# EAGLE board board (EAGLE 9.0.0)
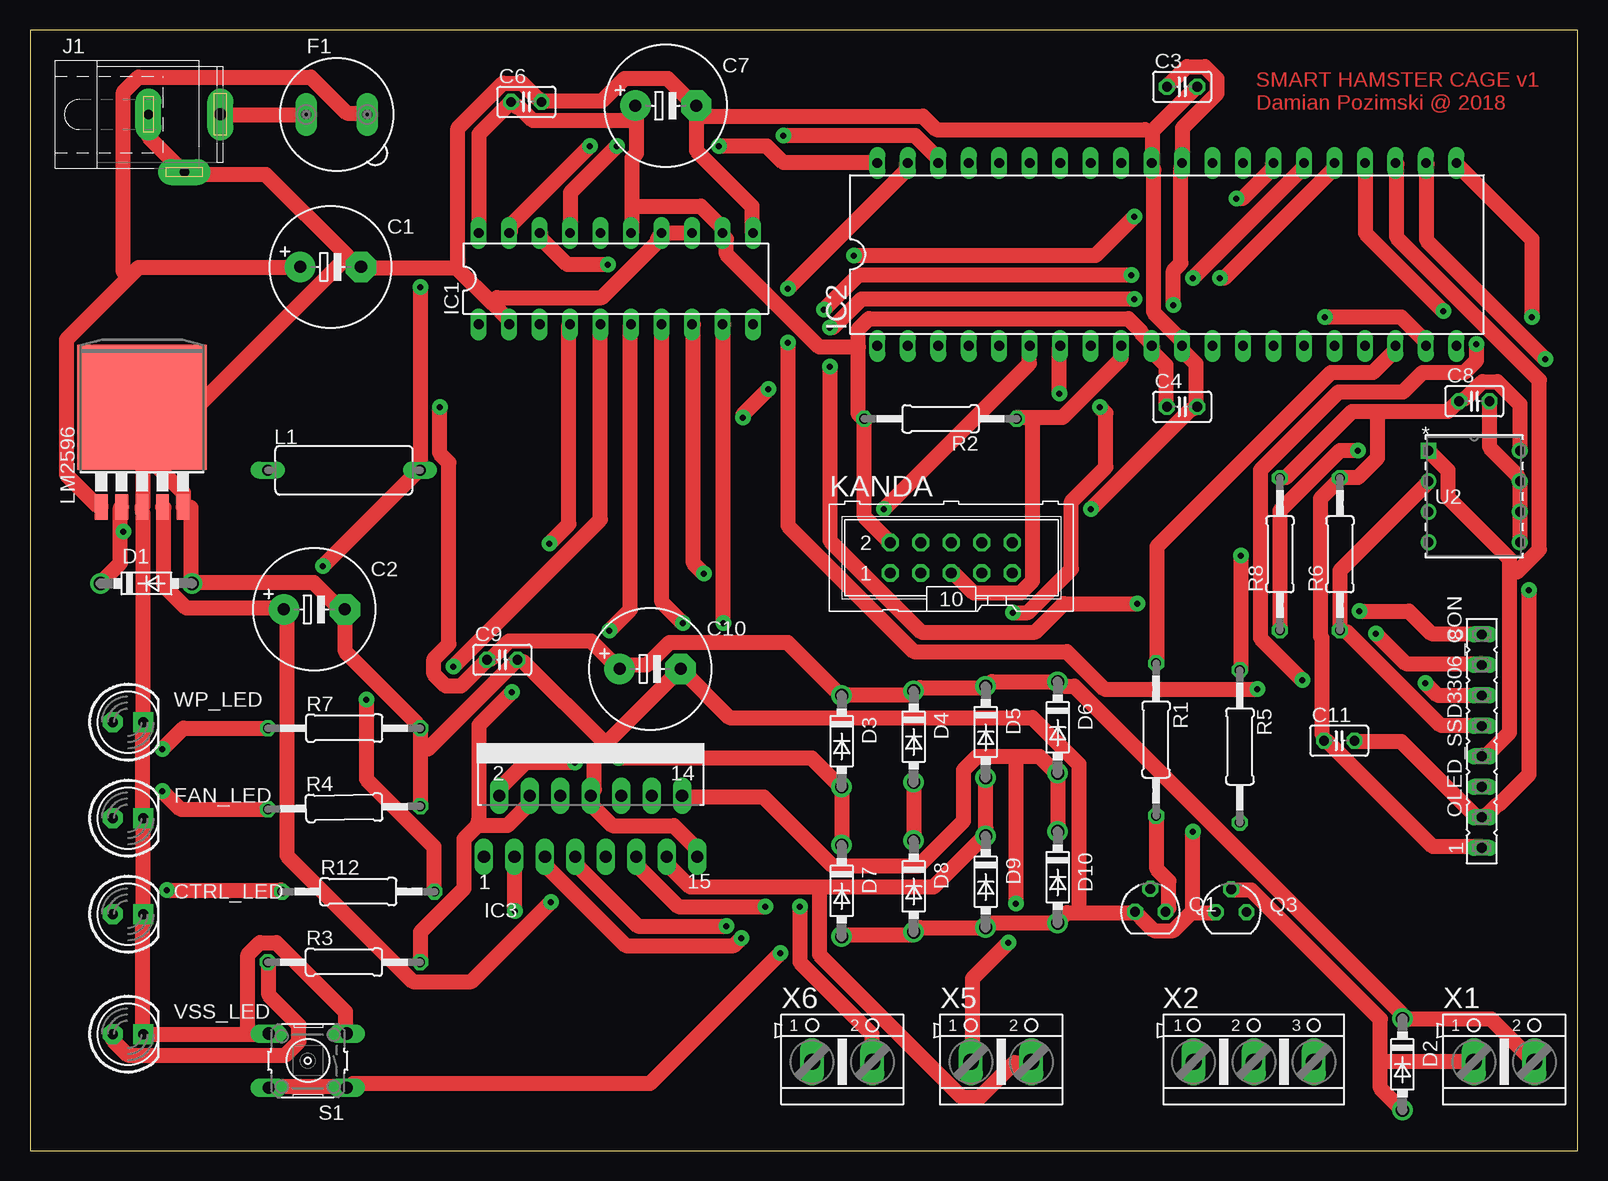
[diagram p0: board, top side]
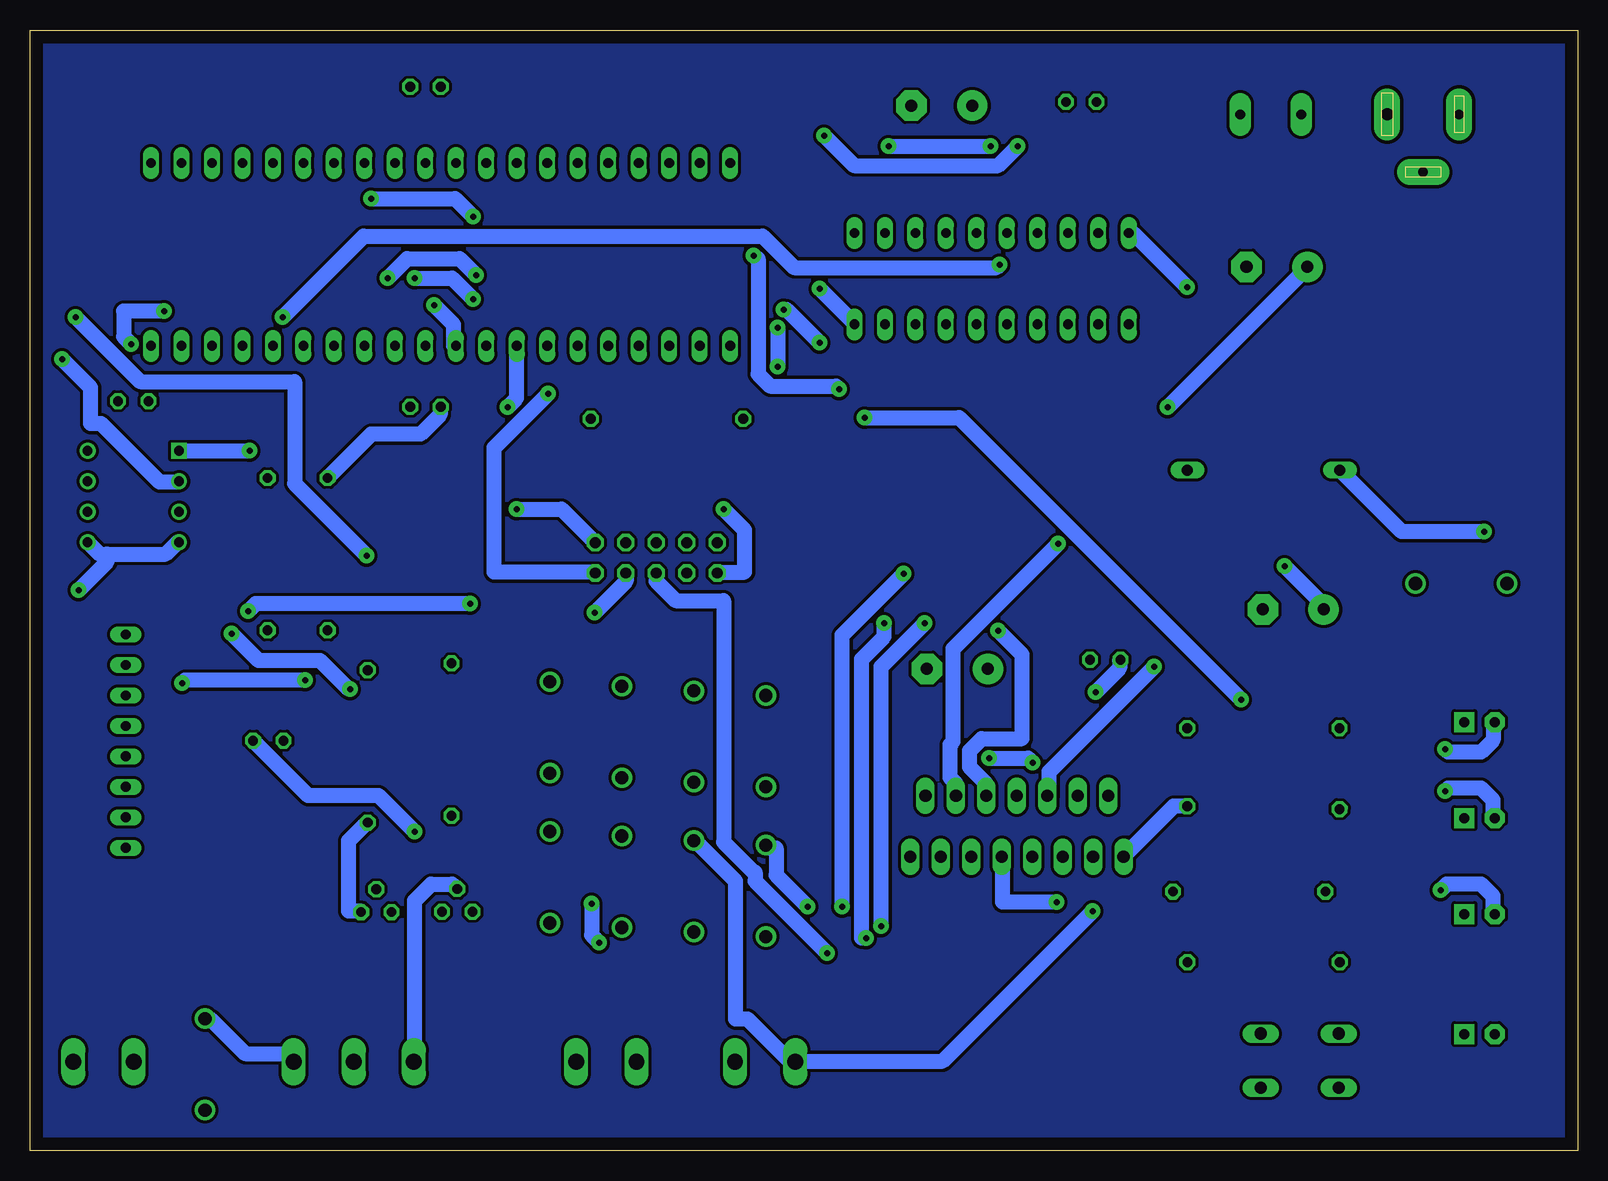
[diagram p1: board, bottom side, seen from below]

Size 128.96 x 93.41 mm. Coordinates in mm from the lower left corner, seen from the top.
Outline: 0,0 128.96,0 128.96,93.41 0,93.41 0,0
Copper layers (1*16): Top 0.035mm / dielectric 1.5mm / Bottom 0.035mm
Design rules "default *": minimum track width 50mil, minimum drill 0.497840625mm, track to track 10mil, track to pad 10mil, pad to pad 10mil, via to via 10mil, smd to smd 10mil, copper to edge 43mil, drill to drill 8mil, minimum pad ring 10mil, minimum via ring 8mil, stop-mask expansion 4mil, vias tented up to drill 0mil, thermal gap 11mil

## Footprints (pad centres in the part's own frame; a part is rotated, then mirrored left to right if it is on the bottom)
E5-10,5 = drill 1.016 pad 2.54: + -2.54,0 | drill 1.016 pad 2.54 octagon: - 2.54,0
C025-025X050 = drill 0.813 octagon: 1 -1.27,0; 2 1.27,0
LED5MM = drill 0.813 pad 1.676 octagon: A -1.27,0 | drill 0.813 pad 1.676 square: K 1.27,0
DO41-7.6 = drill 1.1 pad 1.7: A 3.81,0; C -3.81,0
19560 = drill 0.813 pad 1.778 long: 1 -2.54,0; 2 2.54,0
DIL20 = drill 0.813 long: 1 -11.43,-3.81; 2 -8.89,-3.81; 3 -6.35,-3.81; 4 -3.81,-3.81; 5 -1.27,-3.81; 6 1.27,-3.81; 7 3.81,-3.81; 8 6.35,-3.81; 9 8.89,-3.81; 10 11.43,-3.81; 11 11.43,3.81; 12 8.89,3.81; 13 6.35,3.81; 14 3.81,3.81; 15 1.27,3.81; 16 -1.27,3.81; 17 -3.81,3.81; 18 -6.35,3.81; 19 -8.89,3.81; 20 -11.43,3.81
DIL40 = drill 0.813 long: 1 -24.13,-7.62; 2 -21.59,-7.62; 3 -19.05,-7.62; 4 -16.51,-7.62; 5 -13.97,-7.62; 6 -11.43,-7.62; 7 -8.89,-7.62; 8 -6.35,-7.62; 9 -3.81,-7.62; 10 -1.27,-7.62; 11 1.27,-7.62; 12 3.81,-7.62; 13 6.35,-7.62; 14 8.89,-7.62; 15 11.43,-7.62; 16 13.97,-7.62; 17 16.51,-7.62; 18 19.05,-7.62; 19 21.59,-7.62; 20 24.13,-7.62; 21 24.13,7.62; 22 21.59,7.62; 23 19.05,7.62; 24 16.51,7.62; 25 13.97,7.62; 26 11.43,7.62; 27 8.89,7.62; 28 6.35,7.62; 29 3.81,7.62; 30 1.27,7.62; 31 -1.27,7.62; 32 -3.81,7.62; 33 -6.35,7.62; 34 -8.89,7.62; 35 -11.43,7.62; 36 -13.97,7.62; 37 -16.51,7.62; 38 -19.05,7.62; 39 -21.59,7.62; 40 -24.13,7.62
MULTIWATT-15 = drill 1.016 long: 1 -8.89,-7.62; 2 -7.62,-2.54; 3 -6.35,-7.62; 4 -5.08,-2.54; 5 -3.81,-7.62; 6 -2.54,-2.54; 7 -1.27,-7.62; 8 0,-2.54; 9 1.27,-7.62; 10 2.54,-2.54; 11 3.81,-7.62; 12 5.08,-2.54; 13 6.35,-7.62; 14 7.62,-2.54; 15 8.89,-7.62
SPC4078 = drill 0.8 pad 2.184 long: 1 -3,0; 2 0,-4.8 | drill 1 pad 2.184 long: 3 3,0
ML10 = drill 0.914 octagon: 1 -5.08,-1.27; 2 -5.08,1.27; 3 -2.54,-1.27; 4 -2.54,1.27; 5 0,-1.27; 6 0,1.27; 7 2.54,-1.27; 8 2.54,1.27; 9 5.08,-1.27; 10 5.08,1.27
BC12 = drill 0.914 long: 1 -6.35,0; 2 6.35,0
TO263-5 = smd 1.067 x 2.159: 1 -3.404,-5.791; 2 -1.702,-5.791; 3 0,-5.791; 4 1.702,-5.791; 5 3.404,-5.791 | smd 10.8 x 10.41: 6 0,2.54
FE08 = drill 0.813 long: 1 -8.89,0; 2 -6.35,0; 3 -3.81,0; 4 -1.27,0; 5 1.27,0; 6 3.81,0; 7 6.35,0; 8 8.89,0
SOT54D = drill 0.813 octagon: B 1.27,0; C 0,1.905; E -1.27,0
0207/12 = drill 0.813 octagon: 1 -6.35,0; 2 6.35,0
B3F-10XX = drill 1.016 long: 1 -3.251,2.261; 2 3.251,2.261; 3 -3.251,-2.261; 4 3.251,-2.261
21-0043D_8 = drill 0.813 pad 1.321 square: 1 -7.62,7.62 | drill 0.813 pad 1.321: 2 -7.62,5.08; 3 -7.62,2.54; 4 -7.62,0; 5 0,0; 6 0,2.54; 7 0,5.08; 8 0,7.62
AK500/2 = drill 1.321 long: 1 -2.515,0; 2 2.515,0
AK500/3 = drill 1.321 long: 1 -5.004,0; 2 0,0; 3 5.004,0

## Placement (x,y rotation side)
C1  470uF  [E5-10,5]  25.05,73.67 0 top
C2  220uF  [E5-10,5]  23.69,45.13 0 top
C3  100nF  [C025-025X050]  96.01,88.68 0 top
C4  100nF  [C025-025X050]  96.01,62.01 0 top
C6  100nF  [C025-025X050]  41.36,87.42 0 top
C7  10uF  [E5-10,5]  52.98,87.1 0 top
C8  100nF  [C025-025X050]  120.36,62.48 0 top
C9  100nF  [C025-025X050]  39.36,40.93 0 top
C10  22uF  [E5-10,5]  51.68,40.17 0 top
C11  100nF  [C025-025X050]  109.1,34.19 0 top
CTRL_LED  [LED5MM]  8.16,19.73 0 top
D1  1N5822  [DO41-7.6]  9.69,47.29 0 top
D2  1N5822  [DO41-7.6]  114.37,7.21 270 top
D3  1N5822  [DO41-7.6]  67.64,34.15 270 top
D4  1N5822  [DO41-7.6]  73.64,34.53 270 top
D5  1N5822  [DO41-7.6]  79.64,34.91 270 top
D6  1N5822  [DO41-7.6]  85.64,35.29 270 top
D7  1N5822  [DO41-7.6]  67.64,21.67 270 top
D8  1N5822  [DO41-7.6]  73.64,22.05 270 top
D9  1N5822  [DO41-7.6]  79.64,22.43 270 top
D10  1N5822  [DO41-7.6]  85.64,22.81 270 top
F1  250V/2A 135°C  [19560]  25.56,86.37 0 top
FAN_LED  [LED5MM]  8.16,27.73 0 top
IC1  L297  [DIL20]  48.82,72.69 0 top
IC2  MEGA32-P  [DIL40]  94.74,74.71 0 top
IC3  L298  [MULTIWATT-15]  46.72,32.13 0 top
J1  +12V  [SPC4078]  12.86,86.37 0 top
KANDA  [ML10]  76.78,49.43 0 top
L1  33uH  [BC12]  26.16,56.73 0 top
LM2596  [TO263-5]  9.34,59.45 0 top
OLED_SSD3306_CON  [FE08]  120.98,34.15 90 top
Q1  BC639  [SOT54D]  93.36,19.93 0 top
Q3  BC639  [SOT54D]  100.1,19.9 0 top
R1  240R  [0207/12]  93.84,34.28 270 top
R2  10K  [0207/12]  75.88,61.01 180 top
R3  470R  [0207/12]  26.16,15.73 0 top
R4  470R  [0207/12]  26.18,28.6 1.1 top
R5  240R  [0207/12]  100.82,33.71 270 top
R6  4K7  [0207/12]  109.16,49.73 90 top
R7  470R  [0207/12]  26.18,35.23 0 top
R8  4K7  [0207/12]  104.16,49.73 90 top
R12  330R  [0207/12]  27.36,21.61 0 top
S1  [B3F-10XX]  23.15,7.52 180 top
U2  DS1621+  [21-0043D_8]  124.16,50.73 0 top
VSS_LED  [LED5MM]  8.16,9.73 0 top
WP_LED  [LED5MM]  8.16,35.73 0 top
X1  WATER_PUMP  [AK500/2]  122.84,7.43 0 top
X2  FAN  [AK500/3]  101.98,7.43 0 top
X5  SM_CD  [AK500/2]  80.93,7.43 0 top
X6  SM_AB  [AK500/2]  67.69,7.43 0 top

## Library data of the parts
C1 C2 C7 C10 = resistor
C3 C4 C6 C8 C9 C11 = rcl; SPICEPREFIX: C
CTRL_LED FAN_LED VSS_LED WP_LED = led
D1-D10 = diode
F1 = fuse; MPN: 56000001009; OC_FARNELL: 1185363; OC_NEWARK: 98K6125
IC1 = st-microelectronics; MPN: L297/1; OC_FARNELL: 1094209; OC_NEWARK: 56P8258
IC2 = avr-7
IC3 = st-microelectronics
J1 = con-jack; OC_FARNELL: unknown; OC_NEWARK: unknown
KANDA = con-ml; OC_FARNELL: unknown; OC_NEWARK: unknown
L1 = inductors
LM2596 = linear
OLED_SSD3306_CON = con-lsta; OC_FARNELL: unknown; OC_NEWARK: unknown
Q1 Q3 = transistor-small-signal
R1-R8 R12 = rcl; SPICEPREFIX: R
S1 = switch-omron; MPN: B3F-1000; OC_FARNELL: 176432; OC_NEWARK: 36M3542
U2 = ds1621p; MANUFACTURER_PART_NUMBER: DS1621+; VENDOR: Maxim Integrated Products
X1 X2 X5 X6 = con-ptr500; OC_FARNELL: unknown; OC_NEWARK: unknown

## Nets
AREF: IC2.32
GND: C1.- C2.- C3.2 C4.2 C6.2 C7.- C8.2 C9.2 C10.- C11.2 CTRL_LED.K D1.A D7.A D8.A D9.A D10.A FAN_LED.K IC1.2 IC1.11 IC1.13 IC1.14 IC2.11 IC2.31 IC3.1 IC3.8 IC3.15 J1.1 J1.2 KANDA.10 LM2596.3 LM2596.5 LM2596.6 OLED_SSD3306_CON.2 Q1.E Q3.E R4.2 R7.2 S1.3 S1.4 U2.4 U2.5 U2.6 U2.7 VSS_LED.K WP_LED.K
N$1: F1.1 J1.3
N$2: D1.C L1.1 LM2596.2
N$3: IC2.6 KANDA.1
N$4: IC2.8 KANDA.7
N$6: IC2.7 KANDA.9
N$7: R3.1 VSS_LED.A
N$8: Q1.B R1.2
N$9: Q1.C X2.1
N$10: IC2.9 KANDA.5 R2.1 S1.1 S1.2
N$11: IC2.27 R12.2
N$12: IC2.21 R5.1
N$13: IC1.9 IC3.5
N$14: CTRL_LED.A R12.1
N$15: IC1.5 IC3.6
N$16: IC1.4 IC3.12
N$17: IC1.17 IC2.40
N$18: IC1.18 IC2.19
N$19: IC1.10 IC2.39
N$20: IC1.19 IC2.38
N$21: IC1.8 IC3.11
N$22: R7.1 WP_LED.A
N$23: FAN_LED.A R4.1
N$24: D6.A D10.C IC3.14 X5.1
N$25: D3.A D7.C IC3.2 X6.2
N$26: D4.A D8.C IC3.3 X6.1
N$27: D5.A D9.C IC3.13 X5.2
N$28: Q3.B R5.2
N$29: D2.A Q3.C X1.1
N$31: IC2.18 R1.1
N$35: IC2.23 OLED_SSD3306_CON.4 R8.1 U2.1
N$36: IC2.22 OLED_SSD3306_CON.5 R6.1 U2.2
N$37: IC2.24 OLED_SSD3306_CON.6
N$38: IC2.25 OLED_SSD3306_CON.7
N$39: IC2.26 OLED_SSD3306_CON.8
N$56: IC1.7 IC3.7
N$58: IC1.6 IC3.10
VCC: C2.+ C3.1 C4.1 C6.1 C7.+ C8.1 C11.1 IC1.12 IC1.15 IC1.20 IC2.10 IC2.30 IC3.9 KANDA.2 L1.2 LM2596.4 OLED_SSD3306_CON.1 R2.2 R6.2 R8.2 U2.8
VSS: C1.+ C9.1 C10.+ D2.C D3.C D4.C D5.C D6.C F1.2 IC3.4 LM2596.1 R3.2 X1.2 X2.3

## Tracks (layer width: path | path; a pad name or v marks a point on that pad's centre or on a via)
GND  (via drill 0.5 pad 1.3)
  Top 1.27: 93.53,84.98 93.53,82.36 IC2.31 93.66,81.73 93.66,69.86 95.91,67.61 IC2.11 96.03,66.98 96.03,66.73 97.16,65.61 97.16,62.11 C4.2 96.66,61.73 v88.41,53.48 | 93.53,84.98 97.16,88.61 C3.2 | IC1.11 60.16,76.61 60.16,78.73 55.53,83.36 55.53,86.98 C7.- | C7.- 55.03,87.48 53.16,89.36 49.53,89.36 47.66,87.48 42.66,87.48 C6.2 42.16,87.86 41.03,88.98 39.41,88.98 35.66,85.23 35.66,74.23 35.53,73.61 | J1.1 9.91,86.36 9.91,84.48 12.79,81.61 J1.2 13.41,81.36 19.66,81.36 26.47,74.54 | IC1.13 55.16,76.48 52.66,76.48 IC1.14 52.28,75.98 52.28,75.73 47.66,71.11 38.91,71.11 38.47,70.67 | 35.53,73.61 38.47,70.67 | 38.47,70.67 39.91,69.23 39.91,68.98 IC1.2 | 35.53,73.61 27.66,73.61 C1.- 27.04,73.98 26.47,74.54 | 93.53,84.98 92.91,85.11 75.53,85.11 74.41,86.23 56.16,86.23 C7.- | C11.2 110.41,34.11 114.28,34.11 120.53,27.86 120.91,27.86 OLED_SSD3306_CON.2 121.53,28.11 122.28,28.86 122.41,28.86 124.91,31.36 v124.91,46.73 | C8.2 121.66,62.48 121.66,58.61 123.91,56.36 U2.7 U2.6 U2.5 | 18.16,9.73 VSS_LED.K 9.41,10.36 9.41,19.11 CTRL_LED.K 9.41,19.73 9.41,27.73 FAN_LED.K 9.41,28.36 9.41,35.73 WP_LED.K 9.41,36.36 9.41,53.11 LM2596.3 9.41,53.73 9.41,61.98 LM2596.6 | 18.16,9.73 19.79,9.73 S1.4 | 18.16,9.73 18.16,16.36 19.16,17.36 20.54,17.36 26.29,11.61 26.29,9.86 S1.3 | D7.A 67.66,17.98 73.28,17.98 73.53,18.23 D8.A 74.16,18.61 79.53,18.61 D9.A 80.16,18.98 85.03,18.98 D10.A 85.66,19.11 86.41,19.86 87.41,19.86 | 87.41,19.86 92.03,19.86 Q1.E 92.53,19.48 93.66,18.36 95.28,18.36 96.78,19.86 96.91,19.86 | 96.91,19.86 98.78,19.86 Q3.E | 12.79,53.73 12.79,54.86 10.04,57.61 LM2596.6
  Top 1.27: 12.79,53.73 LM2596.5 | 12.79,53.73 13.41,53.61 13.41,47.36 D1.A 14.04,47.36 23.66,47.36 25.66,45.36 C2.- 26.29,45.11 26.29,41.61 32.16,35.73 R7.2 32.53,33.48 | IC3.15 55.53,24.61 55.53,25.23 53.66,27.11 48.53,27.11 46.78,28.86 46.78,29.48 IC3.8 47.03,30.11 47.03,32.98 47.97,33.92 | 47.97,33.92 54.16,40.11 C10.- 58.28,36.11 83.53,36.11 87.41,32.23 87.41,19.86 | 32.53,33.48 R4.2 | 32.53,33.48 33.16,33.48 40.53,40.86 C9.2 41.16,40.73 47.97,33.92 | 96.91,19.86 v96.91,26.61 | 26.47,74.54 10.41,58.48 LM2596.6
  Bottom 1.27: v88.41,53.48 84.66,53.48 81.91,50.73 KANDA.10 | 122.53,49.73 123.16,49.73 U2.5 | 122.53,49.73 117.66,49.73 116.66,50.73 U2.4 | v124.91,46.73 122.53,49.11 122.53,49.73 | IC3.1 37.78,24.61 33.66,28.73 R4.2 | C11.2 105.78,29.61 99.91,29.61 v96.91,26.61
N$1
  Top 1.27: F1.1 22.91,86.36 15.91,86.36 J1.3
N$2  (via drill 0.5 pad 1.3)
  Top 1.27: 7.54,51.61 7.54,48.98 5.91,47.36 D1.C | 7.54,51.61 7.54,53.61 LM2596.2 | v7.79,51.61 7.54,51.61
  Bottom 1.27: v7.79,51.61 14.66,51.61 19.79,56.73 L1.1
N$3  (via drill 0.5 pad 1.3)
  Top 1.27: v71.16,53.48 83.28,65.61 83.28,66.98 IC2.6
  Bottom 1.27: v71.16,53.48 69.41,51.73 69.41,48.23 71.66,48.23 KANDA.1
N$4  (via drill 0.5 pad 1.3)
  Top 1.27: v89.16,61.98 89.66,61.48 89.66,56.98 86.78,54.11 86.78,48.48 83.16,44.86 v81.91,44.86
  Bottom 1.27: v89.16,61.98 88.41,62.73 88.41,66.98 IC2.8 | v81.91,44.86 79.28,47.48 79.28,48.11 KANDA.7
N$6  (via drill 0.5 pad 1.3)
  Top 1.27: v85.78,63.11 85.78,66.98 IC2.7
  Bottom 1.27: v85.78,63.11 90.28,58.61 90.28,48.23 81.91,48.23 KANDA.9
N$7
  Top 1.27: R3.1 19.91,15.73 19.91,12.98 22.41,10.48 22.41,9.11 21.29,7.98 8.16,7.98 6.91,9.23 6.91,9.73 VSS_LED.A
N$8
  Top 1.27: R1.2 93.91,27.86 93.91,23.48 94.91,22.48 94.91,20.23 94.66,19.98 Q1.B
N$9
  Bottom 1.27: Q1.C 93.41,21.86 93.78,22.23 95.53,22.23 96.91,20.86 96.91,7.48 X2.1
N$10  (via drill 0.5 pad 1.3)
  Top 1.27: S1.2 19.91,5.36 26.29,5.36 S1.1 26.91,5.61 51.66,5.61 v62.53,16.48 | 83.53,61.11 86.03,61.11 90.91,65.98 90.91,66.98 IC2.9 | 83.53,61.11 82.28,61.11 R2.1 | 83.53,61.11 83.53,47.48 82.53,46.48 78.66,46.48 77.03,48.11 76.78,48.11 KANDA.5
  Bottom 1.27: v62.53,16.48 68.53,22.48 68.53,23.23 68.66,23.23 71.16,25.73 71.16,45.86 75.16,45.86 76.78,47.48 76.78,48.11 KANDA.5
N$11  (via drill 0.5 pad 1.3)
  Top 1.27: v28.04,37.61 28.04,30.98 33.66,25.36 33.66,21.73 R12.2 | v59.41,61.11 59.41,61.36 v61.53,63.48 | v68.66,74.61 88.78,74.61 v92.03,77.86 | v100.53,79.36 101.03,79.36 103.53,81.86 103.53,82.23 IC2.27
  Bottom 1.27: v28.04,37.61 51.53,61.11 v59.41,61.11 | v61.53,63.48 61.78,63.73 67.28,63.73 68.28,64.73 68.28,74.36 68.41,74.36 v68.66,74.61 | v92.03,77.86 93.53,79.36 v100.53,79.36
N$12  (via drill 0.5 pad 1.3)
  Top 1.27: v100.91,49.61 100.91,40.11 R5.1 | v125.16,69.48 125.16,75.98 118.91,82.23 IC2.21
  Bottom 1.27: v100.91,49.61 106.91,55.61 106.91,64.11 119.78,64.11 v125.16,69.48
N$13  (via drill 0.5 pad 1.3)
  Top 1.27: v57.78,43.98 57.78,68.86 IC1.9 | v59.28,17.73 58.66,17.11 49.66,17.11 42.91,23.86 IC3.5
  Bottom 1.27: v57.78,43.98 57.78,42.86 59.66,40.98 59.66,17.73 v59.28,17.73
N$14  (via drill 0.5 pad 1.3)
  Top 1.27: v11.41,21.73 20.91,21.73 R12.1
  Bottom 1.27: v11.41,21.73 10.91,22.23 8.04,22.23 7.04,21.23 7.04,19.73 CTRL_LED.A
N$15  (via drill 0.5 pad 1.3)
  Top 1.27: v35.28,40.36 47.53,52.61 47.53,68.86 IC1.5
  Bottom 1.27: v35.28,40.36 44.03,31.61 44.03,29.61 44.16,29.61 IC3.6
N$16  (via drill 0.5 pad 1.3)
  Top 1.27: v43.28,50.61 44.91,52.23 44.91,68.86 IC1.4
  Bottom 1.27: v43.28,50.61 52.03,41.86 52.03,34.11 52.28,33.86 52.28,31.11 51.78,30.61 51.78,29.61 IC3.12
N$17  (via drill 0.5 pad 1.3)
  Top 1.27: v48.91,83.73 45.03,79.86 45.03,76.61 IC1.17 | v57.41,83.73 61.41,83.73 62.78,82.36 70.53,82.36 IC2.40
  Bottom 1.27: v57.41,83.73 v48.91,83.73
N$18  (via drill 0.5 pad 1.3)
  Top 1.27: v48.16,73.86 44.78,73.86 42.53,76.11 42.53,76.48 IC1.18 | v107.91,69.48 114.28,69.48 116.28,67.48 116.28,67.11 IC2.19
  Bottom 1.27: v48.16,73.86 48.41,73.61 65.28,73.61 67.91,76.23 101.16,76.23 v107.91,69.48
N$19  (via drill 0.5 pad 1.3)
  Top 1.27: v63.16,71.86 73.03,81.73 73.03,82.23 IC2.39
  Bottom 1.27: v63.16,71.86 60.28,68.98 IC1.10
N$20  (via drill 0.5 pad 1.3)
  Top 1.27: v46.66,83.73 40.03,77.11 40.03,76.61 IC1.19 | v62.78,84.61 73.78,84.61 75.66,82.73 75.66,82.36 IC2.38
  Bottom 1.27: v46.66,83.73 48.28,82.11 60.28,82.11 v62.78,84.61
N$21  (via drill 0.5 pad 1.3)
  Top 1.27: v56.16,48.11 55.28,48.98 55.28,68.86 IC1.8 | v61.28,20.36 54.03,20.36 50.53,23.86 50.53,24.48 IC3.11
  Bottom 1.27: v56.16,48.11 61.28,42.98 v61.28,20.36
N$22  (via drill 0.5 pad 1.3)
  Top 1.27: R7.1 12.79,35.23 v11.04,33.48
  Bottom 1.27: v11.04,33.48 10.79,33.23 8.04,33.23 7.04,34.23 7.04,35.73 WP_LED.A
N$23  (via drill 0.5 pad 1.3)
  Top 1.27: v11.04,29.98 12.54,28.48 19.79,28.48 R4.1
  Bottom 1.27: v11.04,29.98 10.79,30.23 8.04,30.23 7.04,29.23 7.04,27.73 FAN_LED.A
N$24  (via drill 0.5 pad 1.3)
  Top 1.27: 82.16,32.86 84.16,32.86 85.53,31.48 D6.A 85.66,30.86 85.66,26.73 D10.C | 82.16,32.86 78.91,32.86 77.78,31.73 77.78,27.48 74.03,23.73 66.91,23.73 61.16,29.48 54.41,29.48 IC3.14 | v81.53,17.36 78.53,14.36 78.53,7.48 X5.1 | 82.16,32.86 v82.16,20.61
  Bottom 1.27: v81.53,17.36 82.16,17.98 v82.16,20.61
N$25  (via drill 0.5 pad 1.3)
  Top 1.27: v45.41,32.36 41.28,32.36 39.16,30.23 39.16,29.61 IC3.2 | v49.03,32.73 65.16,32.73 67.53,30.36 D3.A 67.66,29.73 67.66,25.48 D7.C | v64.16,20.36 64.16,15.73 70.16,9.73 70.16,7.48 X6.2
  Bottom 1.27: v45.41,32.36 45.78,32.73 v49.03,32.73 | v64.16,20.36 66.78,22.98 66.78,25.23 67.41,25.23 67.66,25.48 D7.C
N$26  (via drill 0.5 pad 1.3)
  Top 1.27: D8.C 73.66,25.98 73.66,30.61 D4.A | v40.41,19.98 40.41,24.48 IC3.3
  Bottom 1.27: v40.41,19.98 52.91,7.48 65.16,7.48 X6.1 65.78,7.61 69.16,10.98 70.16,10.98 70.16,22.48 73.53,25.86 D8.C
N$27
  Top 1.27: 65.78,21.98 75.28,21.98 79.53,26.23 D9.C 79.66,26.86 79.66,30.98 D5.A | 65.78,21.98 55.03,21.98 53.16,23.86 53.16,24.48 IC3.13 | 65.78,21.98 65.78,16.36 77.66,4.48 79.16,4.48 82.03,7.36 83.41,7.36 X5.2
N$28
  Bottom 1.27: R5.2 100.91,27.36 102.41,25.86 102.41,19.98 101.41,19.98 Q3.B
N$29
  Top 1.27: 112.53,7.48 112.53,5.23 114.28,3.48 D2.A | 112.53,7.48 112.53,10.98 101.78,21.73 100.16,21.73 Q3.C | 112.53,7.48 120.28,7.48 X1.1
N$30
  pour Bottom: 0.16,93.73 0.16,-0.27 129.16,-0.27 129.16,93.73
N$31
  Top 1.27: R1.1 93.91,40.73 93.91,50.36 108.41,64.86 111.91,64.86 113.78,66.73 113.78,66.98 IC2.18
N$35  (via drill 0.5 pad 1.3)
  Top 1.27: R8.1 104.16,53.36 109.16,58.36 v110.66,58.36 | 123.28,48.23 123.28,49.36 118.16,54.48 118.16,56.73 U2.1 | 123.28,48.23 123.28,34.86 121.41,32.98 121.03,32.98 OLED_SSD3306_CON.4 | IC2.23 113.91,82.23 113.91,76.11 125.78,64.23 125.78,50.11 123.91,48.23 123.28,48.23
  Bottom 1.27: v110.66,58.36 U2.1
N$36  (via drill 0.5 pad 1.3)
  Top 1.27: U2.2 116.53,55.73 109.16,48.36 R6.1 109.78,43.23 117.53,35.48 120.91,35.48 OLED_SSD3306_CON.5 | v126.28,65.98 116.41,75.86 116.41,82.23 IC2.22
  Bottom 1.27: v126.28,65.98 123.91,63.61 123.91,60.61 123.03,60.61 118.16,55.73 116.66,55.73 U2.2
N$37  (via drill 0.5 pad 1.3)
  Top 1.27: v116.28,38.98 117.28,37.98 120.91,37.98 OLED_SSD3306_CON.6 | v106.03,39.23 102.53,42.73 102.53,56.73 109.03,63.23 114.41,63.23 116.03,64.86 119.53,64.86 120.53,65.86 v120.53,67.23 | v117.78,69.98 111.28,76.48 111.28,82.23 IC2.24
  Bottom 1.27: v116.28,38.98 116.03,39.23 v106.03,39.23 | v120.53,67.23 121.16,67.86 121.16,69.98 v117.78,69.98
N$38  (via drill 0.5 pad 1.3)
  Top 1.27: v112.16,43.11 114.66,40.61 120.91,40.61 OLED_SSD3306_CON.7 | v102.28,38.48 89.53,38.48 86.41,41.61 73.66,41.61 63.16,52.11 v63.16,67.36 | v66.16,70.11 69.03,72.98 v91.78,72.98 | v99.16,72.73 99.53,72.73 108.66,81.86 108.66,82.23 IC2.25
  Bottom 1.27: v112.16,43.11 109.91,40.86 104.78,40.86 102.41,38.48 v102.28,38.48 | v63.16,67.36 65.91,70.11 v66.16,70.11 | v91.78,72.98 93.16,74.36 97.53,74.36 v99.16,72.73
N$39  (via drill 0.5 pad 1.3)
  Top 1.27: v110.78,44.98 114.91,44.98 116.78,43.11 120.91,43.11 OLED_SSD3306_CON.8 | v92.28,45.61 86.16,45.61 83.78,43.23 74.28,43.23 66.66,50.86 v66.66,65.36 | v66.66,68.61 66.91,68.61 69.28,70.98 v92.03,70.98 | v96.91,72.73 106.16,81.98 106.16,82.23 IC2.26
  Bottom 1.27: v110.78,44.98 110.16,45.61 v92.28,45.61 | v66.66,68.61 v66.66,65.36 | v92.03,70.98 93.78,72.73 v96.91,72.73
N$56  (via drill 0.5 pad 1.3)
  Top 1.27: v54.41,43.98 52.66,45.73 52.66,68.86 IC1.7 | v58.03,18.73 50.66,18.73 45.53,23.86 45.53,24.48 IC3.7
  Bottom 1.27: v54.41,43.98 58.03,40.36 v58.03,18.73
N$58  (via drill 0.5 pad 1.3)
  Top 1.27: v48.28,43.36 50.03,45.11 50.03,68.86 IC1.6
  Bottom 1.27: v48.28,43.36 46.28,41.36 46.28,34.36 49.66,34.36 50.66,33.36 50.66,31.98 49.28,30.61 49.28,29.61 IC3.10
VCC  (via drill 0.5 pad 1.3)
  Top 1.27: LM2596.4 11.16,53.61 11.16,47.11 13.04,45.23 21.04,45.23 C2.+ 21.41,44.61 21.41,24.61 31.91,14.11 36.78,14.11 v43.41,20.73 | v24.41,48.73 32.41,56.73 L1.2 32.53,57.36 v32.53,71.98 | OLED_SSD3306_CON.1 120.91,25.36 116.91,25.36 108.16,34.11 107.91,34.11 C11.1 107.66,34.73 107.66,42.73 107.53,42.86 107.53,54.36 108.78,55.61 R6.2 109.16,56.11 110.66,56.11 112.28,57.73 112.28,61.61 | 112.28,61.61 118.16,61.61 119.03,62.48 C8.1 119.66,62.73 121.03,64.11 122.28,64.11 124.16,62.23 U2.8 | 112.28,61.61 110.16,61.61 104.66,56.11 104.16,56.11 R8.2 | IC1.20 37.41,76.61 37.41,84.73 40.03,87.36 C6.1 40.53,86.98 40.78,86.98 41.91,85.86 49.91,85.86 C7.+ 50.53,86.98 50.53,83.11 50.16,82.73 50.16,78.73 | 50.16,78.73 50.16,76.61 IC1.15 | 50.16,78.73 55.91,78.73 57.66,76.98 57.66,76.61 IC1.12 58.03,75.98 58.03,74.73 65.78,66.98 69.03,66.98 | C3.1 94.78,88.73 96.41,90.36 97.91,90.36 98.91,89.36 98.91,88.11 96.03,85.23 96.03,82.36 IC2.30 95.91,81.73 95.91,73.98 95.28,73.36 v95.28,70.48 | C4.1 94.66,62.11 94.66,65.48 93.53,66.61 93.53,66.98 IC2.10 93.16,67.61 92.53,68.23 92.53,68.36 91.53,69.36 69.91,69.36 69.03,68.48 69.03,66.98 | KANDA.2 71.66,50.73 69.53,52.86 69.53,60.98 R2.2 69.03,61.36 69.03,66.98
  Bottom 1.27: v24.41,48.73 21.16,45.48 21.16,45.23 C2.+ | v43.41,20.73 47.91,20.73 47.91,24.48 IC3.9 | v95.28,70.48 93.66,68.86 93.66,67.11 93.53,67.11 IC2.10 | R8.2 104.16,56.11 100.53,59.73 96.41,59.73 94.78,61.36 94.78,61.98 C4.1 | v32.53,71.98 37.03,76.48 37.28,76.48 IC1.20
VSS  (via drill 0.5 pad 1.3)
  Top 1.27: 8.22,72.79 9.04,73.61 22.41,73.61 C1.+ | 8.22,72.79 3.04,67.61 3.04,56.36 5.66,53.73 5.91,53.73 LM2596.1 | F1.2 28.04,86.48 26.41,86.48 23.41,89.48 9.04,89.48 7.79,88.23 7.79,73.23 8.22,72.79 | X1.2 125.28,7.48 121.78,10.98 114.41,10.98 D2.C 114.16,11.61 87.03,38.73 86.16,38.73 D6.C 85.53,39.11 80.16,39.11 D5.C 79.53,38.61 74.16,38.61 D4.C 73.53,38.23 73.28,37.98 67.66,37.98 D3.C 67.16,38.36 63.16,42.36 53.28,42.36 51.41,40.48 49.66,40.48 C10.+ 49.03,40.23 46.78,42.48 39.91,42.48 38.41,40.98 38.16,40.98 C9.1 37.66,40.48 35.91,38.73 34.66,38.73 33.66,39.73 33.66,40.98 34.91,42.23 34.91,57.36 34.16,58.11 v34.16,61.98 | 37.28,27.11 36.16,25.98 36.16,21.86 32.53,18.23 32.53,15.73 R3.2 | 37.28,27.11 39.78,27.11 41.53,28.86 41.53,29.48 IC3.4 | v40.16,38.23 37.41,35.48 37.41,27.73 37.28,27.11
  Bottom 1.27: X2.3 107.03,7.48 107.66,8.11 111.03,8.11 113.91,10.98 114.28,10.98 D2.C | v40.16,38.23 38.16,40.23 38.16,40.86 C9.1 | v34.16,61.98 22.54,73.61 C1.+

## Text on the board
Top: SMART HAMSTER CAGE v1 / Damian Pozimski @ 2018